# EAGLE board mapleCUx_large_040 (EAGLE 7.3.0)
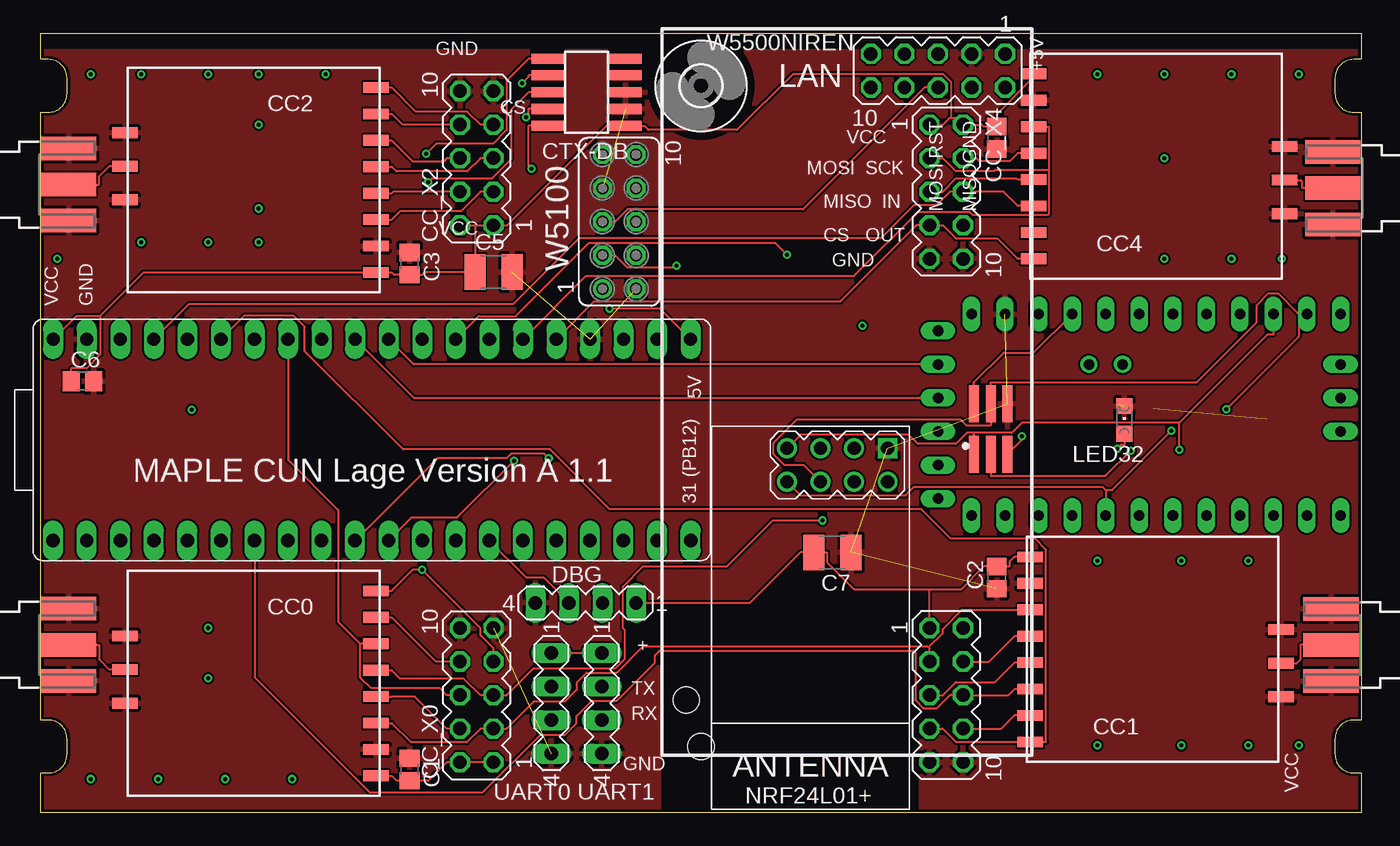
[diagram p0: board, top side]
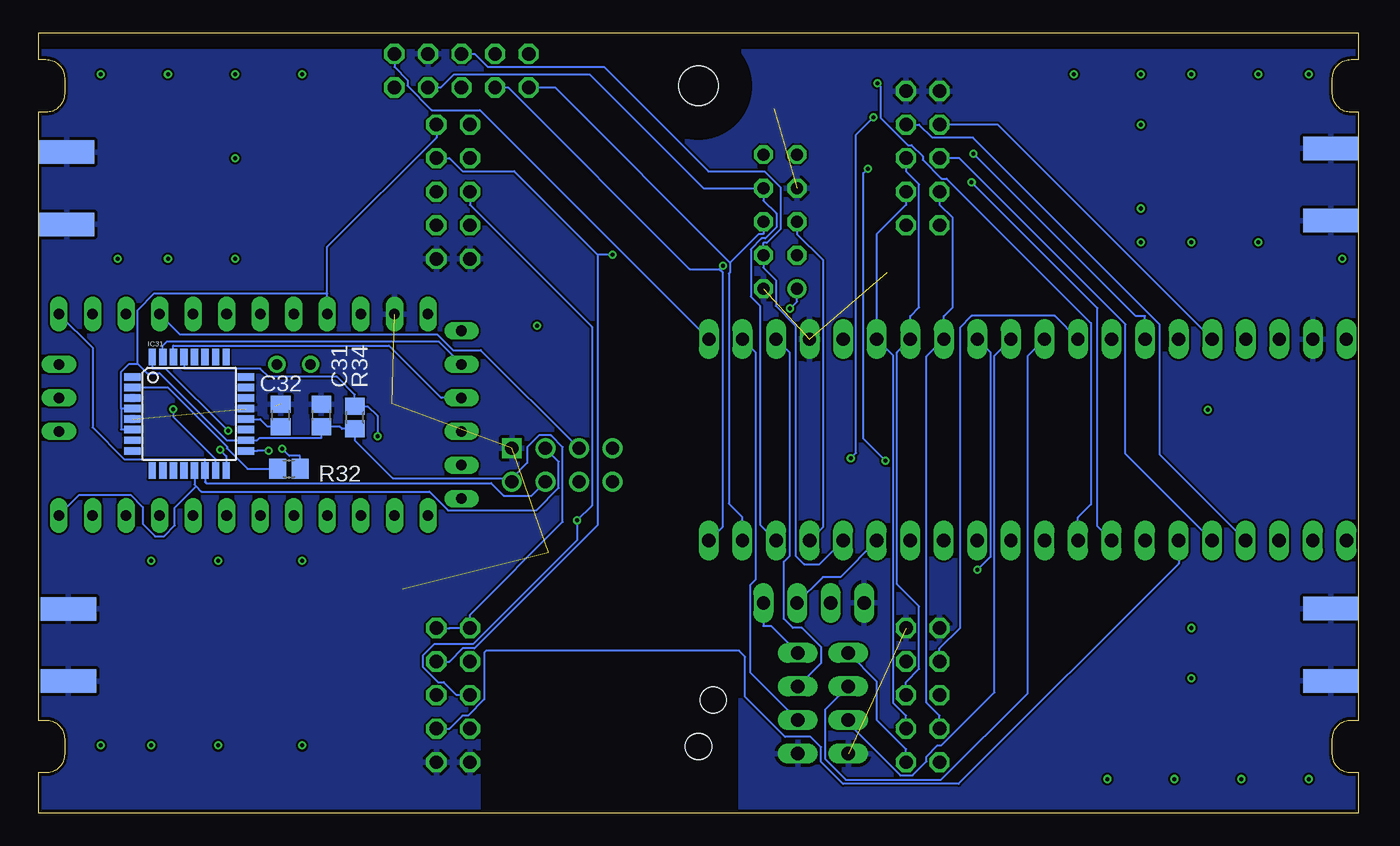
[diagram p1: board, bottom side, seen from below]

Size 100 x 59 mm. Coordinates in mm from the lower left corner, seen from the top.
Outline: 0,0 0,3 0.59,3 arc90 2,4.41 2,5.59 arc90 0.59,7 0,7 0,53 0.59,53 arc90 2,54.41 2,55.59 arc90 0.59,57 0,57 0,59 100,59 100,57 99.41,57 arc90 98,55.59 98,54.41 arc90 99.41,53 100,53 100,7 99.41,7 arc90 98,5.59 98,4.41 arc90 99.41,3 100,3 100,0 0,0
Copper layers (1*16): Top 0.035mm / dielectric 1.5mm / Bottom 0.035mm
Design rules "SeeedStudio_2layer_DRU_no_angle_20140221": minimum track width 6mil, minimum drill 12mil, track to track 6mil, track to pad 6mil, pad to pad 6mil, via to via 6mil, smd to smd 0mil, copper to edge 10mil, drill to drill 10mil, minimum pad ring 10mil, minimum via ring 6mil, stop-mask expansion 2mil, vias tented up to drill 100mil, thermal gap 10mil
Net classes: 1 PWR: width 0.305 mm
Holes 2 mm at 48.9,8.53 50,5
tRestrict: area 0,58 to 100,59; area 47,0 to 66,12
bRestrict: area 0,58 to 100,59; area 0,58 to 100,59; area 47,0 to 66,12

## Footprints (pad centres in the part's own frame; a part is rotated, then mirrored left to right if it is on the bottom)
C0805 = smd 1.3 x 1.5: 1 -0.85,0; 2 0.85,0
C1210 = smd 1.6 x 2.7: 1 -1.4,0; 2 1.4,0
CC1101_MODULE1_SMD = smd 1.93 x 0.813: ANT 19,5.96; CSN 0,0; GDO0 0,2; GDO2 0,4; GND@0 0,12; GND@1 19,8.5; GND@2 19,3.42; MISO 0,6; MOSI 0,10; SCLK 0,8; VCC 0,14
MA05-2 = drill 1.016 octagon: 1 -5.08,-1.27; 2 -5.08,1.27; 3 -2.54,-1.27; 4 -2.54,1.27; 5 0,-1.27; 6 0,1.27; 7 2.54,-1.27; 8 2.54,1.27; 9 5.08,-1.27; 10 5.08,1.27
1365-10 = smd 0.76 x 2.4: 1 -2.54,-2.95; 2 -2.54,2.95; 3 -1.27,-2.95; 4 -1.27,2.95; 5 0,-2.95; 6 0,2.95; 7 1.27,-2.95; 8 1.27,2.95; 9 2.54,-2.95; 10 2.54,2.95
MA04-1 = drill 1.016 long: 1 -3.81,0; 2 -1.27,0; 3 1.27,0; 4 3.81,0
3,0 = hole 3: 0,0
TQFP32-08 = smd 1.27 x 0.559: 1 -4.293,2.8; 2 -4.293,2; 3 -4.293,1.2; 4 -4.293,0.4; 5 -4.293,-0.4; 6 -4.293,-1.2; 7 -4.293,-2; 8 -4.293,-2.8; 17 4.293,-2.8; 18 4.293,-2; 19 4.293,-1.2; 20 4.293,-0.4; 21 4.293,0.4; 22 4.293,1.2; 23 4.293,2; 24 4.293,2.8 | smd 0.559 x 1.27: 9 -2.8,-4.293; 10 -2,-4.293; 11 -1.2,-4.293; 12 -0.4,-4.293; 13 0.4,-4.293; 14 1.2,-4.293; 15 2,-4.293; 16 2.8,-4.293; 25 2.8,4.293; 26 2,4.293; 27 1.2,4.293; 28 0.4,4.293; 29 -0.4,4.293; 30 -1.2,4.293; 31 -2,4.293; 32 -2.8,4.293
CHIPLED_0805 = smd 1.2 x 1.2: A 0,-1.05; C 0,1.05
WIRELESS-NRF24L01 = drill 1 square: 1 -12.7,6.35 | drill 1: 2 -10.16,6.35; 3 -12.7,3.81; 4 -10.16,3.81; 5 -12.7,1.27; 6 -10.16,1.27; 7 -12.7,-1.27; 8 -10.16,-1.27
R0805 = smd 1.3 x 1.5: 1 -0.85,0; 2 0.85,0
20-DIP = drill 1.016 pad 1.27 long: 1 -24.13,-7.62; 2 -21.59,-7.62; 3 -19.05,-7.62; 4 -16.51,-7.62; 5 -13.97,-7.62; 6 -11.43,-7.62; 7 -8.89,-7.62; 8 -6.35,-7.62; 9 -3.81,-7.62; 10 -1.27,-7.62; 11 1.27,-7.62; 12 3.81,-7.62; 13 6.35,-7.62; 14 8.89,-7.62; 15 11.43,-7.62; 16 13.97,-7.62; 17 16.51,-7.62; 18 19.05,-7.62; 19 21.59,-7.62; 20 24.13,-7.62 | drill 1 pad 1.27 long: 21 24.13,7.62; 22 21.59,7.62; 23 19.05,7.62; 24 16.51,7.62; 25 13.97,7.62; 26 11.43,7.62; 27 8.89,7.62; 28 6.35,7.62; 29 3.81,7.62; 30 1.27,7.62; 31 -1.27,7.62; 32 -3.81,7.62; 33 -6.35,7.62; 34 -8.89,7.62; 35 -11.43,7.62; 36 -13.97,7.62; 37 -16.51,7.62; 38 -19.05,7.62; 39 -21.59,7.62; 40 -24.13,7.62
ABK-PRO-MINI = drill 0.8 long: A0 10.16,-3.81; A1 10.16,-6.35; A2 10.16,-8.89; A3 10.16,-11.43; A6 3.81,-21.59; A7 6.35,-21.59; D2 -5.08,-3.81; D3 -5.08,-6.35; D4 -5.08,-8.89; D5 -5.08,-11.43; D6 -5.08,-13.97; D7 -5.08,-16.51; D8 -5.08,-19.05; D9 -5.08,-21.59; D10 10.16,-21.59; D11 10.16,-19.05; D12 10.16,-16.51; D13 10.16,-13.97; DTR 8.89,8.89; GND 10.16,3.81; GND1 -5.08,-1.27; GND2 -3.81,8.89; GND3 -1.27,8.89; GND4 1.27,-21.59; RAW 10.16,6.35; RST 10.16,1.27; RST1 -5.08,1.27; RX1 -5.08,3.81; RX1-1 3.81,8.89; TX0 -5.08,6.35; TX0-1 6.35,8.89; VCC 10.16,-1.27; VCC1 1.27,8.89 | drill 0.8: A4 6.35,-5.08; A5 6.35,-2.54
FE05-2 = drill 0.914: 1 -5.08,1.27 | drill 0.914 octagon: 2 -5.08,-1.27; 3 -2.54,1.27; 4 -2.54,-1.27; 5 0,1.27; 6 0,-1.27; 7 2.54,1.27; 8 2.54,-1.27; 9 5.08,1.27; 10 5.08,-1.27
SMA = smd 4.191 x 1.778: 1 2.115,0; GND@1 2.115,2.733; GND@2 2.115,-2.733 | smd 4.191 x 1.778 bottom: GND@3 2.115,2.733; GND@4 2.115,-2.733
2X03-1.27MM_SMD = smd 0.75 x 2.8: P$1 -1.27,-1.905; P$2 -1.27,1.905; P$3 0,-1.905; P$4 0,1.905; P$5 1.27,-1.905; P$6 1.27,1.905

## Placement (x,y rotation side)
C1  22pF  [C0805]  27.94,3.25 270 top
C2  22pF  [C0805]  72.39,17.78 90 top
C3  22pF  [C0805]  27.94,41.55 270 top
C4  22pF  [C0805]  72.39,51.07 90 top
C5  10uF  [C1210]  34.29,40.91 0 top
C6  22pF  [C0805]  3.17,32.66 0 top
C7  4,7  [C1210]  59.95,19.68 180 top
C31  100n  [C0805]  78.56,30.06 90 bottom
C32  100n  [C0805]  81.64,30.06 90 bottom
CC0  CC1101_MODULE1SMD  [CC1101_MODULE1_SMD]  25.4,16.78 180 top
CC1  CC1101_MODULE1SMD  [CC1101_MODULE1_SMD]  74.93,5.35 0 top
CC2  CC1101_MODULE1SMD  [CC1101_MODULE1_SMD]  25.4,54.88 180 top
CC4  CC1101_MODULE1SMD  [CC1101_MODULE1_SMD]  75.18,41.91 0 top
CC_X0  [MA05-2]  33.02,8.89 90 top
CC_X1  [MA05-2]  68.58,8.89 270 top
CC_X2  [MA05-2]  33.02,49.53 90 top
CC_X4  [MA05-2]  68.58,46.99 270 top
CTX-DB  1365-10  [1365-10]  41.33,54.52 90 top
DBG  [MA04-1]  41.27,15.88 180 top
H6  MOUNT-HOLE3.0  [3,0]  50,55 0 top
IC31  ATMEGA168-TQFP  [TQFP32-08]  88.56,30.18 0 bottom
LED32  [CHIPLED_0805]  82.06,29.72 0 top
NRF24L01+  NRF24L01+  [WIRELESS-NRF24L01]  57.78,14.88 270 top
R32  1k  [R0805]  81.02,26.02 0 bottom
R34  [R0805]  76.02,29.9 90 bottom
U$1  MAPLEMINI  [20-DIP]  25.08,28.21 0 top
U$2  ABK-PRO-MINI  [ABK-PRO-MINI]  76.83,27.57 90 top
UART0  [MA04-1]  38.66,8.28 270 top
UART1  [MA04-1]  42.49,8.28 270 top
W5100  [FE05-2]  43.81,44.72 90 top
W5500NIREN  [MA05-2]  67.94,56.15 180 top
X1  SMA  [SMA]  99.82,12.68 180 top
X2  SMA  [SMA]  0,12.7 0 top
X3  SMA  [SMA]  0,47.53 0 top
X4  SMA  [SMA]  99.95,47.26 180 top
X31  M03X2  [2X03-1.27MM_SMD]  71.94,29.02 0 top

## Library data of the parts
C1-C7 C31 C32 R32 R34 = rcl
CC0 CC1 CC2 CC4 = wireless
CC_X0 CC_X1 CC_X2 CC_X4 DBG UART0 UART1 W5500NIREN = con-lstb; OC_FARNELL: unknown; OC_NEWARK: unknown
CTX-DB = con-leotronics; OC_FARNELL: unknown; OC_NEWARK: unknown
H6 = holes
IC31 = atmel
LED32 = led
NRF24L01+ = diy-modules
U$1 = maplemini-small
U$2 = Arduino-clone
W5100 = con-lsta; OC_FARNELL: unknown; OC_NEWARK: unknown
X1-X4 = sma
X31 = mechanics

## Nets
+5V: U$1.21 W5100.1 W5500NIREN.1
CC_CS0: CC0.CSN CC_X0.7 U$1.29
CC_CS1: CC1.CSN CC_X1.7 U$1.35
CC_CS2: CC2.CSN CC_X2.7 U$1.4
CC_CS3: CC4.CSN CC_X4.7 U$1.25
CC_IN_0: CC0.GDO2 CC_X0.6 U$1.33
CC_IN_1: CC1.GDO2 CC_X1.6 U$1.7
CC_IN_2: CC2.GDO2 CC_X2.6 U$1.5
CC_IN_3: CC4.GDO2 CC_X4.6 U$1.37
CC_OUT_0: CC0.GDO0 CC_X0.8 U$1.32
CC_OUT_1: CC1.GDO0 CC_X1.8 U$1.6
CC_OUT_2: CC2.GDO0 CC_X2.8 U$1.36
CE-A: IC31.13 NRF24L01+.3 U$2.D9
CSN-A: IC31.14 NRF24L01+.4 U$2.D10
GND: C1.1 C2.1 C3.1 C4.1 C5.2 C6.2 C7.1 C31.2 C32.2 CC0.GND@0 CC0.GND@1 CC0.GND@2 CC1.GND@0 CC1.GND@1 CC1.GND@2 CC2.GND@0 CC2.GND@1 CC2.GND@2 CC4.GND@0 CC4.GND@1 CC4.GND@2 CC_X0.9 CC_X0.10 CC_X1.9 CC_X1.10 CC_X2.9 CC_X2.10 CC_X4.9 CC_X4.10 CTX-DB.3 CTX-DB.5 DBG.4 IC31.3 IC31.5 IC31.21 LED32.C NRF24L01+.1 U$1.24 U$1.39 U$2.GND UART0.4 UART1.4 W5100.2 W5100.7 W5500NIREN.3 X1.GND@1 X1.GND@2 X1.GND@3 X1.GND@4 X2.GND@1 X2.GND@2 X2.GND@3 X2.GND@4 X3.GND@1 X3.GND@2 X3.GND@3 X3.GND@4 X4.GND@1 X4.GND@2 X4.GND@3 X4.GND@4 X31.P$6
IRQ-A: IC31.32 NRF24L01+.8 U$2.D2
M-RES: IC31.29 R34.2 X31.P$5
M-SCK: IC31.17 X31.P$3
MISO1: CC0.MISO CC1.MISO CC2.MISO CC4.MISO CC_X0.5 CC_X1.5 CC_X2.5 CC_X4.5 U$1.27
MISO2: U$1.18 W5100.8 W5500NIREN.4
MISO-A: IC31.16 NRF24L01+.7 U$2.D12 X31.P$1
MOSI1: CC0.MOSI CC1.MOSI CC2.MOSI CC4.MOSI CC_X0.3 CC_X1.3 CC_X2.3 CC_X4.3 U$1.26
MOSI-A: IC31.15 NRF24L01+.6 U$2.D11 X31.P$4
N$1: CC2.ANT X3.1
N$2: CC4.ANT X4.1
N$3: CC1.ANT X1.1
N$4: CC0.ANT X2.1
N$5: LED32.A R32.2
N$8: CTX-DB.7
N$15: C32.1 IC31.20
NC: CTX-DB.9
NRESET: CTX-DB.10 U$1.34
RST: U$1.17 W5100.5 W5500NIREN.6
RX1: U$1.22 UART1.3
RX-MAPLE: IC31.31 U$1.30 U$2.TX0-1 UART0.3
RX_DBG: DBG.3 U$1.14
RX_LED: IC31.2 R32.1
SCK1: CC0.SCLK CC1.SCLK CC2.SCLK CC4.SCLK CC_X0.4 CC_X1.4 CC_X2.4 CC_X4.4 U$1.28
SCK2: U$1.19 W5100.6 W5500NIREN.10
SCK-A: NRF24L01+.5 U$2.D13
SWCLK/TCK: CTX-DB.4 U$1.10
SWDIO/TMS: CTX-DB.2 U$1.11
SWO/TDO: CTX-DB.6 U$1.8
TDI: CTX-DB.8 U$1.9
TX1: U$1.23 UART1.2
TX-MAPLE: IC31.30 U$1.31 U$2.RX1-1 UART0.2
TX_DBG: DBG.2 U$1.15
VCC: C1.2 C2.2 C3.2 C4.2 C5.1 C6.1 C7.2 C31.1 CC0.VCC CC1.VCC CC2.VCC CC4.VCC CC_X0.1 CC_X0.2 CC_X1.1 CC_X1.2 CC_X2.1 CC_X2.2 CC_X4.1 CC_X4.2 CTX-DB.1 DBG.1 IC31.4 IC31.6 IC31.18 NRF24L01+.2 R34.1 U$1.40 U$2.VCC UART0.1 UART1.1 X31.P$2
WIZ_CS: U$1.20 W5100.3 W5500NIREN.8
WIZ_RST: U$1.16 W5100.4 W5500NIREN.5

## Tracks (layer width: path | path; a pad name or v marks a point on that pad's centre or on a via)
+5V  (via drill 0.3 pad 0.61)
  Top 0.152: U$1.21 46.89,38.15 v43.07,38.15
  Bottom 0.152: W5500NIREN.1 73.03,56.43 72.03,55.44 72.03,55.02 70.19,53.17 66.56,53.17 U$1.21 | v43.07,38.15 42.55,38.68 W5100.1
CC_CS0  (via drill 0.3 pad 0.61)
  Top 0.152: CC_X0.7 34.29,12.42 33.3,13.41 33.3,13.96 v28.9,18.36 28.18,18.36 26.59,16.78 CC0.CSN
  Bottom 0.152: U$1.29 27.9,34.84 27.9,19.36 v28.9,18.36
CC_CS1
  Top 0.152: U$1.35 15.41,37.59 19.18,37.59 20,36.77 20,34.93 27.45,27.48 38.57,27.48 43.09,22.97 66.68,22.97 68.92,20.73 75.3,20.73 76.12,19.9 76.12,5.35 CC1.CSN 69.3,5.35 68.3,6.35 CC_X1.7
CC_CS2
  Top 0.152: CC2.CSN 26.59,54.88 28.41,53.06 32.31,53.06 33.3,52.07 CC_X2.7
  Bottom 0.152: CC_X2.7 33.3,52.07 32.31,51.08 29.23,51.08 15.07,36.93 15.07,27.09 U$1.4
CC_CS3
  Top 0.152: U$1.25 41.92,38.7 60.57,38.7 66.32,44.45 CC_X4.7 68.3,44.45 69.29,43.46 72.44,43.46 73.99,41.91 CC4.CSN
CC_IN_0
  Top 0.152: CC_X0.6 30.76,8.89 30.23,9.41 25.01,9.41 24.21,10.22 24.21,12.78 | CC0.GDO2 24.21,12.78 | U$1.33 18.73,26.69 22.54,22.88 22.54,14.44 24.21,12.78
CC_IN_1
  Top 0.152: U$1.7 16.19,10.26 24.93,1.52 33.47,1.52 37.84,5.89 39.73,5.89 40.58,6.75 40.58,7.29 41.75,8.47 43.63,8.47 46.52,11.35 46.52,11.91 46.85,12.25 66.08,12.25 66.23,12.1 66.23,8.53 66.86,7.9 67.87,7.9 68.86,8.89 CC_X1.6 73.28,8.89 73.74,9.35 CC1.GDO2
CC_IN_2
  Top 0.152: CC2.GDO2 26.59,50.88 28.21,49.27 30.5,49.27 30.76,49.53 CC_X2.6
  Bottom 0.152: U$1.5 17.68,27.15 17.68,36.95 30.25,49.53 CC_X2.6
CC_IN_3
  Top 0.152: U$1.37 11.24,38.5 35.8,38.5 40.79,43.49 63.66,43.49 66.17,46 67.87,46 68.86,46.99 CC_X4.6 72.91,46.99 73.99,45.91 CC4.GDO2
CC_OUT_0
  Top 0.152: CC0.GDO0 26.59,14.78 29.94,11.43 CC_X0.8
  Bottom 0.152: CC_X0.8 31.75,12.42 30.2,13.97 30.2,36.71 29.32,37.59 23.03,37.59 U$1.32
CC_OUT_1
  Top 0.152: CC1.GDO0 73.74,7.35 72.74,6.35 CC_X1.8
  Bottom 0.152: CC_X1.8 68.86,6.35 67.87,7.34 67.46,7.34 66.23,8.57 66.23,12.1 66.08,12.25 46.92,12.25 46.47,11.79 46.47,8.75 43.45,5.74 41.51,5.74 40.73,4.95 40.73,3.84 39.06,2.18 30.31,2.18 13.65,18.84 U$1.6
CC_OUT_2
  Top 0.152: CC2.GDO0 26.59,52.88 27.4,52.07 CC_X2.8
  Bottom 0.152: U$1.36 27.35,52.07 CC_X2.8
CE-A
  Bottom 0.152: 88.03,24.68 87.64,24.3 70.38,24.3 68.96,22.88 62.28,22.88 60.59,24.57 60.59,26.57 NRF24L01+.3 | IC31.13 88.16,24.82 88.03,24.68 | U$2.D9 96.88,24.04 92.99,24.04 92.08,23.13 92.08,21.84 91.14,20.91 90.47,20.91 89.64,21.74 89.64,23.07 88.03,24.68
CSN-A
  Bottom 0.152: U$2.D10 95.89,35.2 95.89,29.15 93.49,26.75 87.36,26.75 IC31.14 87.36,25.02 87.27,24.93 65.69,24.93 64.75,24 62.63,24 NRF24L01+.4
GND  (10 unrouted)
  pour Bottom: 0,59 0,0 46.99,0 46.99,13.97 66.67,13.97 66.67,0 100,0 100,59
  pour Top: 0,0 0,59 100,59 100,0 66.67,0 66.67,13.97 46.99,13.97 46.99,0
IRQ-A  (via drill 0.3 pad 0.61)
  Top 0.152: 80.64,24.39 U$2.D2 | NRF24L01+.8 57.55,24 65.48,24 66.13,24.65 80.39,24.65 80.64,24.39 | v85.61,28.89 81.11,24.39 80.64,24.39
  Bottom 0.152: IC31.32 91.36,33.61 90.33,33.61 v85.61,28.89
M-RES  (via drill 0.3 pad 0.61)
  Top 0.152: X31.P$5 74.31,28.22 v74.31,28.49
  Bottom 0.152: v74.31,28.49 74.31,30.02 75.04,30.75 R34.2 76.02,31.63 77.37,32.98 82.55,32.98 83.19,33.61 88.96,33.61 IC31.29
M-SCK  (via drill 0.3 pad 0.61)
  Top 0.152: X31.P$3 71.94,25.49 80.63,25.49 v82.54,27.4
  Bottom 0.152: IC31.17 83.4,27.38 83.39,27.4 v82.54,27.4
MISO1  (via drill 0.3 pad 0.61)
  Top 0.152: CC1.MISO 73.74,11.35 72.27,9.88 69.29,9.88 68.3,8.89 CC_X1.5 | CC2.MISO 26.59,48.88 26.94,48.53 32.3,48.53 33.3,49.53 CC_X2.5 | CC4.MISO 73.99,47.91 73.89,48.01 69.32,48.01 68.3,46.99 CC_X4.5 | v59.19,22.11 55.44,22.11 51.97,18.64 45.63,18.64 44.09,17.1 44.09,13.96 44.25,13.8 44.25,11.65 43.52,10.92 37.31,10.92 35.28,8.89 CC_X0.5 33.8,8.89 33.3,8.89 32.04,10.14 27.23,10.14 26.59,10.78 CC0.MISO
  Bottom 0.152: CC_X1.5 68.3,8.89 69.29,9.88 69.72,9.88 70.88,11.04 70.88,11.87 70.01,12.74 67.07,12.74 59.19,20.63 v59.19,22.11 58.07,23.22 58.07,36.76 67.31,46 CC_X4.5 | CC_X2.5 34.29,48.54 33.3,47.55 33.3,38.24 33.97,37.57 U$1.27 34.98,34.83 34.98,17.28 33.3,15.61 33.3,10.87 34.29,9.88 CC_X0.5
MISO2
  Bottom 0.152: W5500NIREN.4 69.49,54.88 68.49,55.88 58.26,55.88 49.64,47.26 W5100.8 45.09,46.32 44.11,45.34 44.11,44.29 44.95,43.45 45.22,43.45 46.04,42.62 46.04,39.05 45.34,38.35 45.34,21.8 U$1.18
MISO-A  (via drill 0.3 pad 0.61)
  Top 0.152: 86.23,29.5 | 86.23,29.5 74.28,29.5 73.53,28.74 70.67,28.74 | 86.23,29.5 92.93,36.2 93.34,36.2 U$2.D12 | v86.23,27.45 86.23,29.5 | X31.P$1 70.67,28.74 | 70.67,28.74 70.14,28.74 69.3,27.9 66.44,27.9 65.72,28.61 57.55,28.61 NRF24L01+.7
  Bottom 0.152: v86.23,27.45 85.76,26.98 IC31.16
MOSI1
  Top 0.152: 67.24,12.49 68.3,13.56 68.3,13.88 69.77,15.35 CC1.MOSI | 67.24,12.49 67.22,12.49 67.13,12.59 45.63,12.59 43.63,10.59 41.33,10.59 40.62,9.87 40.62,9.33 39.73,8.44 37.37,8.44 35.28,6.35 CC_X0.3 33.91,6.35 33.3,6.35 32.26,5.31 28.07,5.31 26.59,6.78 CC0.MOSI | 67.24,12.49 | 67.24,12.49 67.31,12.42 CC_X1.3 | 76.38,48.6 76.38,51.91 CC4.MOSI | U$1.26 41.3,40.62 61.59,40.62 66.46,45.49 70.32,45.49 70.55,45.26 76.32,45.26 76.38,45.32 76.38,48.6 | 76.38,48.6 72.27,48.6 72.21,48.54 69.29,48.54 68.3,49.53 CC_X4.3 | CC2.MOSI 26.59,44.88 27.23,45.52 31.82,45.52 33.3,46.99 CC_X2.3
  Bottom 0.152: CC_X0.3 34.29,7.34 35.28,8.33 35.28,34.6 U$1.26 36.51,43.78 34.29,46 CC_X2.3
MOSI-A  (via drill 0.3 pad 0.61)
  Top 0.152: 95.25,37.73 95.25,36.01 v89.76,30.52 | 95.25,37.73 93.7,39.29 92.97,39.29 92.08,38.4 92.08,37.1 87.53,32.55 71.94,32.55 X31.P$4 71.94,29.3 70.11,29.3 69.65,29.76 57.28,29.76 55.5,27.98 55.5,27.14 56.33,26.3 57.78,26.3 NRF24L01+.6 | 95.25,37.73 U$2.D11
  Bottom 0.152: IC31.15 86.56,26.75 89.76,29.95 v89.76,30.52
N$1
  Top 0.152: X3.1 4.44,47.53 4.44,48.15 5.21,48.92 CC2.ANT
N$2
  Top 0.152: X4.1 95.51,47.26 95.51,47.74 95.38,47.87 CC4.ANT
N$3
  Top 0.152: X1.1 95.38,12.68 95.38,11.57 95.12,11.31 CC1.ANT
N$4
  Top 0.152: X2.1 4.44,12.7 4.44,11.59 5.21,10.82 CC0.ANT
N$5  (via drill 0.3 pad 0.61)
  Top 0.152: LED32.A 82.06,27.84 81.82,27.84 v81.52,27.54
  Bottom 0.152: R32.2 80.17,27 80.98,27 v81.52,27.54
N$6  (via drill 0.3 pad 0.61)
  other vias: 3.81,55.88
N$7  (via drill 0.3 pad 0.61)
  other vias: 1.27,41.91
N$9  (via drill 0.3 pad 0.61)
  other vias: 3.81,2.54
N$10  (via drill 0.3 pad 0.61)
  other vias: 8.89,2.54
N$11  (via drill 0.3 pad 0.61)
  other vias: 13.97,2.54
N$12  (via drill 0.3 pad 0.61)
  other vias: 19.05,2.54
N$13  (via drill 0.3 pad 0.61)
  other vias: 7.62,55.88
N$14  (via drill 0.3 pad 0.61)
  other vias: 12.7,55.88
N$15
  Bottom 0.152: C32.1 82.62,29.21 83.19,29.78 IC31.20
N$16  (via drill 0.3 pad 0.61)
  other vias: 95.25,55.88
N$17  (via drill 0.3 pad 0.61)
  other vias: 90.17,55.88
N$18  (via drill 0.3 pad 0.61)
  other vias: 85.09,55.88
N$19  (via drill 0.3 pad 0.61)
  other vias: 80.01,55.88
N$20  (via drill 0.3 pad 0.61)
  other vias: 85.09,41.91
N$21  (via drill 0.3 pad 0.61)
  other vias: 86.36,19.05
N$22  (via drill 0.3 pad 0.61)
  other vias: 95.25,5.08
N$23  (via drill 0.3 pad 0.61)
  other vias: 91.44,5.08
N$24  (via drill 0.3 pad 0.61)
  other vias: 90.17,41.91
N$25  (via drill 0.3 pad 0.61)
  other vias: 80.01,5.08
N$26  (via drill 0.3 pad 0.61)
  other vias: 62.23,36.83
N$27  (via drill 0.3 pad 0.61)
  other vias: 16.51,45.72
N$28  (via drill 0.3 pad 0.61)
  other vias: 12.7,13.97
N$29  (via drill 0.3 pad 0.61)
  other vias: 11.43,30.48
N$30  (via drill 0.3 pad 0.61)
  other vias: 85.09,49.53
N$31  (via drill 0.3 pad 0.61)
  other vias: 80.01,19.05
N$32  (via drill 0.3 pad 0.61)
  other vias: 86.36,5.08
N$33  (via drill 0.3 pad 0.61)
  other vias: 91.44,19.05
N$35  (via drill 0.3 pad 0.61)
  other vias: 16.51,43.18
N$36  (via drill 0.3 pad 0.61)
  other vias: 21.59,55.88
N$37  (via drill 0.3 pad 0.61)
  other vias: 16.51,55.88
N$38  (via drill 0.3 pad 0.61)
  other vias: 12.7,10.16
N$39  (via drill 0.3 pad 0.61)
  other vias: 93.98,41.91
N$40  (via drill 0.3 pad 0.61)
  other vias: 16.51,52.07
N$41  (via drill 0.3 pad 0.61)
  other vias: 12.7,43.18
N$42  (via drill 0.3 pad 0.61)
  other vias: 7.62,43.18
NRESET  (via drill 0.3 pad 0.61)
  Top 0.152: v29.18,49.85 29.96,50.63 34.26,50.63 35.29,51.66 35.29,55.4 36.95,57.06 CTX-DB.10
  Bottom 0.152: U$1.34 16.19,37.57 16.9,37.57 v29.18,49.85
RST
  Top 0.152: W5100.5 43.48,44.72 44.42,45.66 57.73,45.66 66.95,54.88 W5500NIREN.6
  Bottom 0.152: W5100.5 42.55,43.78 40.59,41.83 40.59,21.59 U$1.17
RX1
  Bottom 0.152: UART1.3 46.08,10.59 46.08,17.23 45.66,17.65 45.66,34.81 U$1.22
RX-MAPLE
  Top 0.152: U$2.TX0-1 28.26,33.92 U$1.30
  Bottom 0.152: UART0.3 38.66,6.76 34.72,2.81 33.8,2.81 32.74,3.88 32.74,4.24 31.9,5.08 31.61,5.08 27.6,9.1 27.6,34.59 U$1.30 | IC31.31 90.56,35.34 90.25,35.64 69.66,35.64 U$2.TX0-1
RX_DBG
  Top 0.152: U$1.14 36.76,17.8 38.08,17.8 DBG.3
RX_LED
  Bottom 0.152: IC31.2 90.2,32.18 85.7,27.68 85.7,27.56 84.16,26.02 R32.1
SCK1  (via drill 0.3 pad 0.61)
  Top 0.152: CC1.SCLK 73.74,13.35 71.82,11.43 CC_X1.4 | CC4.SCLK 73.99,49.91 73.42,49.34 71.03,49.34 70.84,49.53 CC_X4.4 | U$1.28 33.17,37.57 35.98,37.57 41.53,43.12 55.61,43.12 v56.51,42.22 | CC0.SCLK 25.92,8.78 26.59,8.78 28.33,8.78 30.76,6.35 31.25,6.35 CC_X0.4 | CC2.SCLK 26.59,46.88 26.7,46.99 CC_X2.4
  Bottom 0.152: 57.63,42.22 57.63,21.75 66.96,12.42 67.87,12.42 68.86,11.43 CC_X1.4 | 57.63,42.22 63.95,48.54 67.87,48.54 68.86,49.53 CC_X4.4 | v56.51,42.22 57.63,42.22 | CC_X2.4 31.75,46 30.76,45.01 30.76,38.24 31.43,37.57 U$1.28 32.74,34.52 32.74,8.33 31.75,7.34 CC_X0.4
SCK2
  Bottom 0.152: 47.61,41.62 47.61,40.89 47.7,40.8 47.7,23.38 46.67,22.34 U$1.19 | 47.61,41.62 60.87,54.88 61.87,54.88 W5500NIREN.10 | 47.61,41.62 45.45,43.78 45.09,43.78 W5100.6
SCK-A
  Bottom 0.152: U$2.D13 89.27,36.2 69.79,36.2 68.59,35 66.48,35 NRF24L01+.5
SWCLK/TCK  (via drill 0.3 pad 0.61)
  Top 0.152: v38.48,26.82 38.12,27.18 35.63,27.18 35.27,26.82 | 35.27,26.82 | 35.27,26.82 30.05,26.82 U$1.10 | CTX-DB.4 36.95,53.25 36.95,52.82 v36.75,52.62
  Bottom 0.152: v38.48,26.82 38.07,27.23 38.07,51.3 v36.75,52.62
SWDIO/TMS  (via drill 0.3 pad 0.61)
  Top 0.152: CTX-DB.2 36.95,51.98 36.95,48.95 v37.16,48.74 | U$1.11 28.11,22.34 31.55,22.34 v35.85,26.64
  Bottom 0.152: v35.85,26.64 37.52,28.31 37.52,48.39 v37.16,48.74
SWO/TDO  (via drill 0.3 pad 0.61)
  Top 0.152: v29.32,47.7 29.61,47.99 34.16,47.99 35.62,49.45 35.62,53.19 36.95,54.52 CTX-DB.6
  Bottom 0.152: U$1.8 19.8,21.66 19.8,38.18 v29.32,47.7
TDI  (via drill 0.3 pad 0.61)
  Top 0.152: CTX-DB.8 36.95,55.79 36.95,55.69 v36.45,55.19
  Bottom 0.152: v36.45,55.19 36.22,54.96 36.22,52.59 34.15,50.52 33.87,50.52 33.02,49.67 33.02,49.39 31.61,47.98 31.23,47.98 20.29,37.04 20.29,23.33 21.27,22.34 U$1.9
TX1
  Bottom 0.152: UART1.2 40.71,11.33 40.71,12.51 42.18,13.98 42.86,13.98 43.54,14.67 43.54,19 43.09,19.45 43.09,34.79 U$1.23
TX-MAPLE
  Top 0.152: U$1.31 28.26,31.39 U$2.RX1-1
  Bottom 0.152: UART0.2 40.42,7.79 40.42,4.06 38.85,2.48 31.65,2.48 25.08,9.05 25.08,34.56 U$1.31 | IC31.30 89.76,35.34 73.43,35.34 69.48,31.39 U$2.RX1-1
TX_DBG
  Bottom 0.152: U$1.15 39.27,17.83 40.59,17.83 DBG.2
VCC
  Top 0.152: X31.P$2 70.67,32.55 72.92,34.81 75.18,34.81 U$2.VCC | CC_X4.1 68.3,52.07 68.8,52.56 68.96,52.56 | 68.96,52.56 69.85,52.56 CC_X4.2 71.26,52.07 71.41,51.92 C4.2 72.39,52.84 75.18,55.64 CC4.VCC | 68.96,52.56 68.96,55.27 68.36,55.88 56.95,55.88 52.74,51.67 46.02,51.67 45.71,51.98 CTX-DB.1 42.85,51.98 35.32,44.45 CC_X2.1 32.89,44.45 | DBG.1 53.71,15.88 57.52,19.68 C7.2 59.57,19.68 59.57,18.91 61.61,16.88 67.31,16.88 | 67.31,16.88 69.66,16.88 71.41,18.63 C2.2 73.37,18.63 73.37,18.98 73.74,19.35 CC1.VCC | 67.31,16.88 67.31,14.96 CC_X1.1 | 32.89,44.45 C5.1 29.13,40.91 28.92,40.7 C3.2 26.78,40.7 26.59,40.88 CC2.VCC 7.8,40.88 4.52,37.6 | U$1.40 2.72,37.6 4.52,37.6 | 4.52,37.6 4.52,34.68 3.48,33.63 2.33,33.63 C6.1 | CC0.VCC 26.59,2.78 26.59,2.77 26.96,2.4 C1.2 29.35,2.4 30.76,3.81 CC_X0.2 CC_X0.1 | 32.89,44.45 32.24,44.45 CC_X2.2 | UART0.1 UART1.1
  Bottom 0.152: 92.45,33.96 91.75,33.26 90.81,33.26 85.73,28.18 IC31.18 83.91,28.18 83.4,28.18 83.25,28.33 78.56,28.33 C31.1 77.16,29.21 77,29.05 R34.1 76.02,28.17 73.15,25.3 64.14,25.3 | 93.72,30.58 93.72,33.36 93.12,33.96 92.45,33.96 | 92.45,33.96 92.45,38.03 91.19,39.29 78.11,39.29 | 64.14,25.3 62.97,26.47 62.97,27.66 62.08,28.56 61.17,28.56 60.28,27.67 60.28,21.99 67.31,14.96 CC_X1.1 68.86,13.97 CC_X1.2 | NRF24L01+.2 64.14,25.3 | IC31.6 93.72,28.98 93.72,30.58 | 78.11,39.29 78.11,42.82 69.85,51.08 CC_X4.2 | U$2.VCC 78.11,39.29 | IC31.4 93.72,30.58 | CC_X0.1 34.29,4.8 36.49,7 36.49,9.91 UART0.1 | DBG.1 45.09,14.12 44.53,14.12 UART1.1
WIZ_CS  (via drill 0.3 pad 0.61)
  Top 0.152: W5100.3 43.48,42.18 44.42,41.24 47.99,41.24 v48.15,41.4
  Bottom 0.152: 48.42,41.13 48.2,40.92 48.2,21.6 U$1.20 | 48.42,41.13 50.66,41.13 64.41,54.88 W5500NIREN.8 | 48.42,41.13 v48.15,41.4
WIZ_RST
  Bottom 0.152: W5500NIREN.5 66.95,57.42 65.96,56.43 57.15,56.43 49.25,48.53 45,48.53 43.78,47.32 43.78,44.16 44.82,43.12 45.09,43.12 W5100.4 45.09,41.24 44.15,40.3 44.15,38.35 42.66,36.86 42.66,19.45 42.01,18.81 40.83,18.81 U$1.16

## Text on the board
bOrigins: MAPLE CUN Lage Version A 1.1
tNames: +5V | GND | LAN | CS | RST | GND | VCC | GND | MOSI | MISO | MOSI | SCK | MISO | IN | VCC | CS | OUT | GND | W5100 | VCC | GND | 5V | MAPLE CUN Lage Version A 1.1 | 31 (PB12) | + | TX | RX | GND | VCC